# EAGLE board main_board (EAGLE 7.7.0)
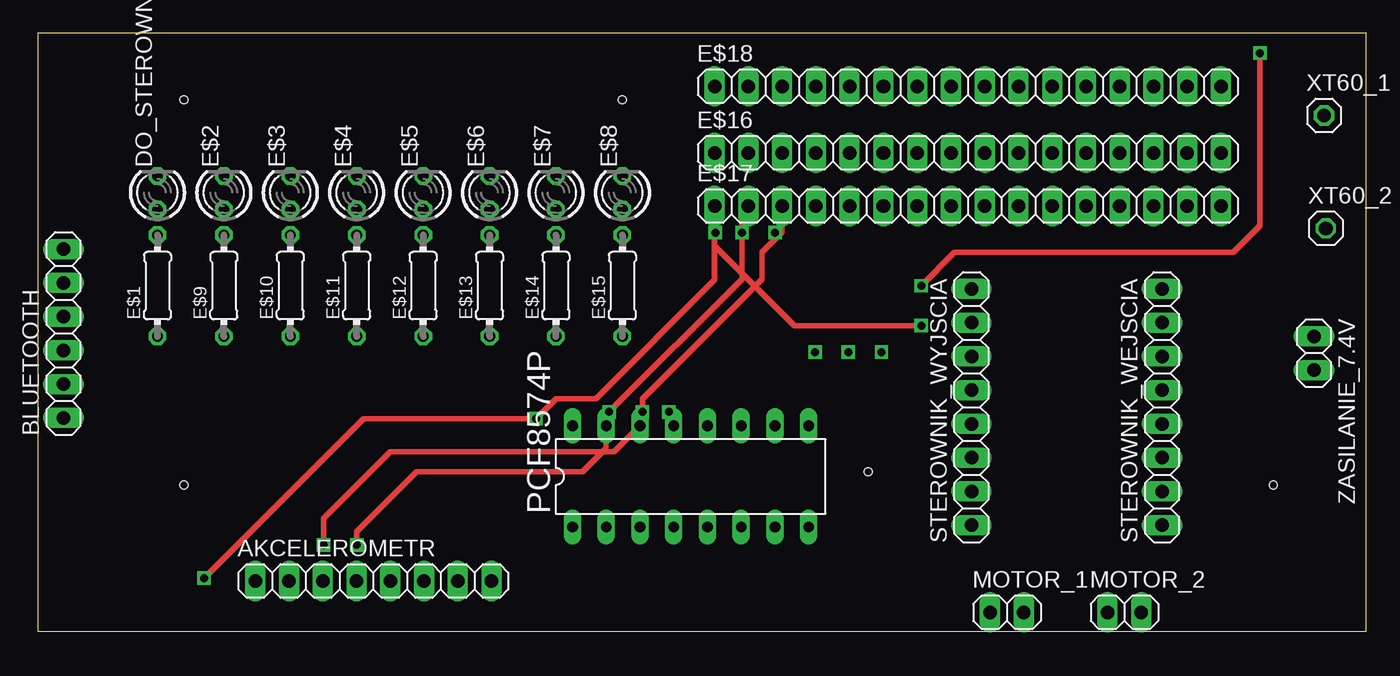
[diagram p0: board, top side]
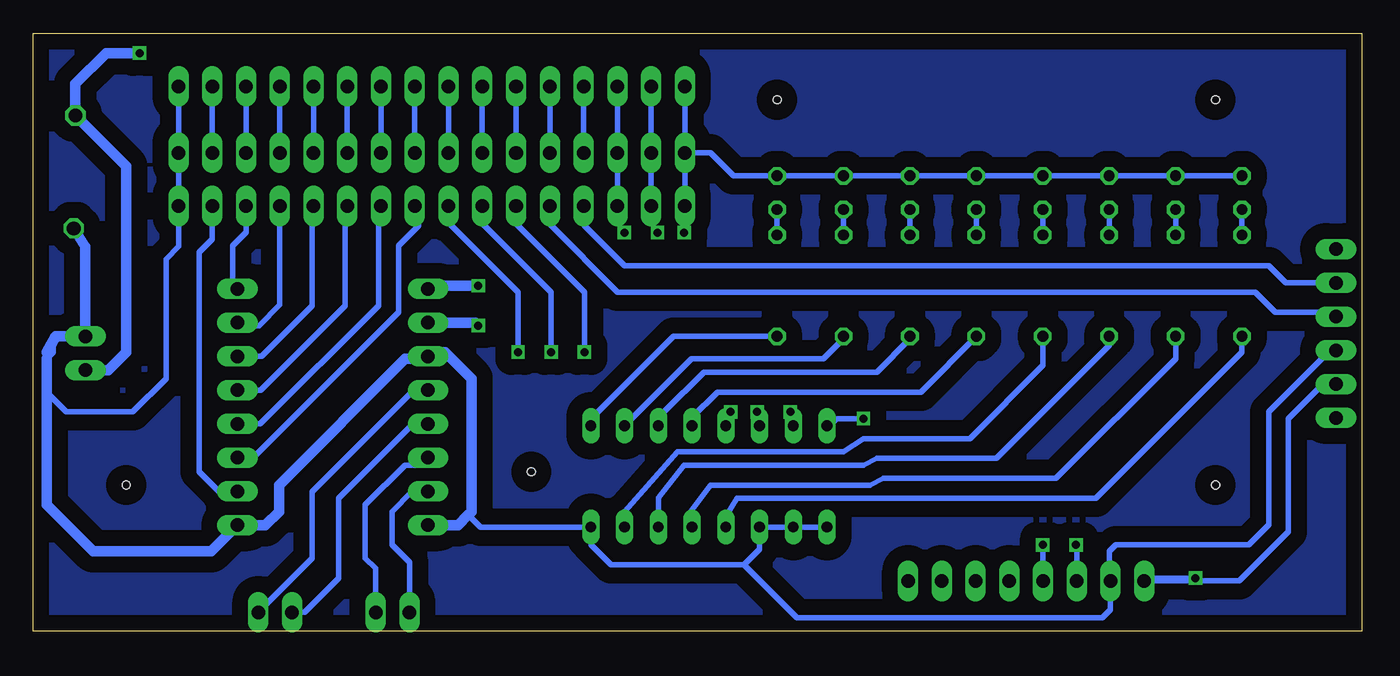
[diagram p1: board, bottom side, seen from below]

Size 100 x 45 mm. Coordinates in mm from the lower left corner, seen from the top.
Outline: 0,0 100,0 100,45 0,45 0,0
Copper layers (1*16): Top 0.035mm / dielectric 1.5mm / Bottom 0.035mm
Design rules "default": minimum track width 10mil, minimum drill 24mil, track to track 8mil, track to pad 8mil, pad to pad 8mil, via to via 8mil, smd to smd 8mil, copper to edge 40mil, drill to drill 8mil, minimum pad ring 10mil, minimum via ring 8mil, stop-mask expansion 4mil, vias tented up to drill 0mil, thermal gap 10mil
Holes 0.6 mm at 11,11 93,11 11,40 44,40 62.5,12

## Footprints (pad centres in the part's own frame; a part is rotated, then mirrored left to right if it is on the bottom)
1X08 = drill 1.016 long: 1 -8.89,0; 2 -6.35,0; 3 -3.81,0; 4 -1.27,0; 5 1.27,0; 6 3.81,0; 7 6.35,0; 8 8.89,0
1X06 = drill 1.016 long: 1 -6.35,0; 2 -3.81,0; 3 -1.27,0; 4 1.27,0; 5 3.81,0; 6 6.35,0
LED3MM = drill 0.813 octagon: A -1.27,0; K 1.27,0
0204/7 = drill 0.813 octagon: 1 -3.81,0; 2 3.81,0
1X16 = drill 1.016 long: 1 -19.05,0; 2 -16.51,0; 3 -13.97,0; 4 -11.43,0; 5 -8.89,0; 6 -6.35,0; 7 -3.81,0; 8 -1.27,0; 9 1.27,0; 10 3.81,0; 11 6.35,0; 12 8.89,0; 13 11.43,0; 14 13.97,0; 15 16.51,0; 16 19.05,0
1X02 = drill 1.016 long: 1 -1.27,0; 2 1.27,0
DIL16 = drill 0.813 long: 1 -8.89,-3.81; 2 -6.35,-3.81; 3 -3.81,-3.81; 4 -1.27,-3.81; 5 1.27,-3.81; 6 3.81,-3.81; 7 6.35,-3.81; 8 8.89,-3.81; 9 8.89,3.81; 10 6.35,3.81; 11 3.81,3.81; 12 1.27,3.81; 13 -1.27,3.81; 14 -3.81,3.81; 15 -6.35,3.81; 16 -8.89,3.81
1X01 = drill 1.016 octagon: 1 0,0

## Placement (x,y rotation side)
AKCELEROMETR  [1X08]  25.25,3.78 0 top
BLUETOOTH  [1X06]  1.93,22.41 90 top
DO_STEROWNIKA_MINUS  [LED3MM]  9,33 90 top
E$1  [0204/7]  9,26 90 top
E$2  [LED3MM]  14,33 90 top
E$3  [LED3MM]  19,33 90 top
E$4  [LED3MM]  24,33 90 top
E$5  [LED3MM]  29,33 90 top
E$6  [LED3MM]  34,33 90 top
E$7  [LED3MM]  39,33 90 top
E$8  [LED3MM]  44,33 90 top
E$9  [0204/7]  14,26 90 top
E$10  [0204/7]  19,26 90 top
E$11  [0204/7]  24,26 90 top
E$12  [0204/7]  29,26 90 top
E$13  [0204/7]  34,26 90 top
E$14  [0204/7]  39,26 90 top
E$15  [0204/7]  44,26 90 top
E$16  [1X16]  70,36 0 top
E$17  [1X16]  70,32 0 top
E$18  [1X16]  70,41 0 top
MOTOR_1  [1X02]  72.95,1.42 0 top
MOTOR_2  [1X02]  81.79,1.42 0 top
PCF8574P  PCF8574P  [DIL16]  49.13,11.65 0 top
STEROWNIK_WEJSCIA  [1X08]  84.63,16.87 90 top
STEROWNIK_WYJSCIA  [1X08]  70.28,16.87 90 top
XT60_1  8mm  [1X01]  96.82,38.81 0 top
XT60_2  8mm  [1X01]  96.95,30.32 0 top
ZASILANIE_7.4V  [1X02]  96.07,20.91 270 top

## Library data of the parts
AKCELEROMETR BLUETOOTH E$16-E$18 MOTOR_1 MOTOR_2 STEROWNIK_WEJSCIA STEROWNIK_WYJSCIA XT60_1 XT60_2 ZASILANIE_7.4V = pinhead
DO_STEROWNIKA_MINUS E$2-E$8 = led
E$1 E$9-E$15 = rcl
PCF8574P = micro-philips; MPN: PCF8574PN; OC_FARNELL: 204020; OC_NEWARK: 11N8515

## Nets
GND: AKCELEROMETR.2 BLUETOOTH.3 E$16.16 E$17.16 E$18.16 PCF8574P.1 PCF8574P.2 PCF8574P.3 PCF8574P.8 STEROWNIK_WEJSCIA.1 STEROWNIK_WYJSCIA.1 STEROWNIK_WYJSCIA.6 XT60_2.1 ZASILANIE_7.4V.1
RX: BLUETOOTH.5 E$17.4
S$2: DO_STEROWNIKA_MINUS.A E$1.2
S$3: E$2.A E$9.2
S$4: E$3.A E$10.2
S$5: E$4.A E$11.2
S$6: E$5.A E$12.2
S$7: E$6.A E$13.2
S$8: E$7.A E$14.2
S$9: E$8.A E$15.2
S$10: E$17.15 STEROWNIK_WEJSCIA.2
S$11: MOTOR_1.1 STEROWNIK_WYJSCIA.2
S$12: MOTOR_1.2 STEROWNIK_WYJSCIA.3
S$13: MOTOR_2.1 STEROWNIK_WYJSCIA.4
S$14: MOTOR_2.2 STEROWNIK_WYJSCIA.5
S$15: E$17.14 STEROWNIK_WEJSCIA.8
S$16: E$16.8 E$18.8
S$17: E$16.9 E$18.9
S$18: E$16.10 E$18.10
S$19: E$16.11 E$18.11
S$20: E$16.12 E$18.12
S$21: E$16.7 E$18.7
S$22: E$16.6 E$18.6
S$23: E$16.5 E$18.5
S$24: E$16.4 E$18.4
S$26: E$16.13 E$18.13
S$27: E$16.14 E$18.14
S$28: E$16.15 E$18.15
S$30: E$17.13 STEROWNIK_WEJSCIA.7
S$31: E$17.12 STEROWNIK_WEJSCIA.6
S$32: E$17.11 STEROWNIK_WEJSCIA.5
S$33: E$17.10 STEROWNIK_WEJSCIA.4
S$34: E$17.9 STEROWNIK_WEJSCIA.3
S$37: E$15.1 PCF8574P.9
S$38: E$14.1 PCF8574P.10
S$39: E$13.1 PCF8574P.11
S$40: E$12.1 PCF8574P.12
S$41: E$11.1 PCF8574P.7
S$42: E$10.1 PCF8574P.6
S$43: E$9.1 PCF8574P.5
S$44: E$1.1 PCF8574P.4
S$47: E$17.7
S$48: E$17.6
S$49: E$17.8
SCL: AKCELEROMETR.3 E$16.3 E$17.3 E$18.3 PCF8574P.14
SDA: AKCELEROMETR.4 E$16.2 E$17.2 E$18.2 PCF8574P.15
TX: BLUETOOTH.4 E$17.5
VCC: STEROWNIK_WYJSCIA.8 XT60_1.1 ZASILANIE_7.4V.2
VDD: AKCELEROMETR.1 BLUETOOTH.2 DO_STEROWNIKA_MINUS.K E$2.K E$8.K E$16.1 E$17.1 E$18.1 PCF8574P.16 STEROWNIK_WYJSCIA.7

## Tracks (layer width: path | path; a pad name or v marks a point on that pad's centre or on a via)
GND
  Bottom 0.406: 84.65,8 STEROWNIK_WEJSCIA.1 | 67,9 67.25,8.75 66.34,7.84 PCF8574P.8 58,7.82 58,6.5 56.5,5 46.5,5 | 70.46,20.5 STEROWNIK_WYJSCIA.6 | PCF8574P.1 PCF8574P.2 PCF8574P.3 45.32,6.18 46.5,5 | 46.5,5 42.5,1 19.5,1 18.9,1.6 AKCELEROMETR.2 19,3.88 19,6 18.5,6.5 8.5,6.5 7,8 7,16.5 2.36,21.14 BLUETOOTH.3 | E$18.16 89,40.95 89,40 89.05,39.95 E$16.16 E$17.16 | 89,31.95 E$17.16 | 98.32,22.18 98.5,22 98.5,21 99,20.5 | E$17.16 89.05,28.95 90,28 90,19 92.5,16.5 97.5,16.5 99,18
  Bottom 0.8: STEROWNIK_WYJSCIA.1 68.02,7.98 67.25,8.75 | 67,9 67,19 69,21 69.96,21 STEROWNIK_WYJSCIA.6 | 70.46,20.5 72,20.5 81.5,11 81.5,9 82.52,7.98 STEROWNIK_WEJSCIA.1 86.61,6 95.5,6 99,9.5 99,18 99,20.5 | XT60_2.1 96.07,28.94 ZASILANIE_7.4V.1 98.32,22.18 99,21
RX
  Bottom 0.406: BLUETOOTH.5 5.72,26.22 7,27.5 55.5,27.5 58.5,30.5 58.5,31.93 E$17.4
S$1  (via drill 0.6)
  other vias: 43,16.5
S$2
  Bottom 0.406: DO_STEROWNIKA_MINUS.A E$1.2
S$3
  Bottom 0.406: E$2.A E$9.2
S$4
  Bottom 0.406: E$3.A E$10.2
S$5
  Bottom 0.406: E$4.A E$11.2
S$6
  Bottom 0.406: E$5.A E$12.2
S$7
  Bottom 0.406: E$6.A E$13.2
S$8
  Bottom 0.406: E$7.A E$14.2
S$9
  Bottom 0.406: E$8.A E$15.2
S$10
  Bottom 0.406: E$17.15 86.51,29.49 87.5,28.5 87.5,12 86,10.5 84.65,10.5 STEROWNIK_WEJSCIA.2
S$11
  Bottom 0.406: MOTOR_1.1 71.68,5.18 73,6.5 73,9 71.5,10.5 70.3,10.5 STEROWNIK_WYJSCIA.2
S$12
  Bottom 0.406: MOTOR_1.2 74.22,4.72 75,5.5 75,9.5 72,12.5 70.84,12.5 STEROWNIK_WYJSCIA.3
S$13
  Bottom 0.406: MOTOR_2.1 79.58,1.42 77,4 77,10 71.5,15.5 70.38,15.5 STEROWNIK_WYJSCIA.4
S$14
  Bottom 0.406: MOTOR_2.2 83.06,1.44 79,5.5 79,10.5 71.5,18 70.42,18 STEROWNIK_WYJSCIA.5
S$15
  Bottom 0.406: E$17.14 83.97,30.03 85,29 85,26.13 STEROWNIK_WEJSCIA.8
S$16
  Bottom 0.406: E$18.8 E$16.8
S$17
  Bottom 0.406: E$18.9 E$16.9
S$18
  Bottom 0.406: E$18.10 E$16.10
S$19
  Bottom 0.406: E$18.11 E$16.11
S$20
  Bottom 0.406: E$18.12 E$16.12
S$21
  Bottom 0.406: E$18.7 E$16.7
S$22
  Bottom 0.406: E$18.6 E$16.6
S$23
  Bottom 0.406: E$18.5 E$16.5
S$24
  Bottom 0.406: E$18.4 E$16.4
S$25  (via drill 0.6)
  other vias: 45.5,16.5
S$26
  Bottom 0.406: E$18.13 E$16.13
S$27
  Bottom 0.406: E$18.14 83.97,36.03 84,36 E$16.14
S$28
  Bottom 0.406: E$18.15 E$16.15
S$29  (via drill 0.6)
  other vias: 51,30
S$30
  Bottom 0.406: E$17.13 81.43,24.57 83,23 84.41,23 STEROWNIK_WEJSCIA.7
S$31
  Bottom 0.406: STEROWNIK_WEJSCIA.6 82.82,20.68 79,24.5 79,31.89 E$17.12
S$32
  Bottom 0.406: STEROWNIK_WEJSCIA.5 82.86,18.14 76.5,24.5 76.5,31 76,31.5 76,31.65 E$17.11
S$33
  Bottom 0.406: STEROWNIK_WEJSCIA.4 82.9,15.6 74,24.5 74,31.81 E$17.10
S$34
  Bottom 0.406: STEROWNIK_WEJSCIA.3 83.44,13.06 72.5,24 72.5,29 71,30.5 71,31.73 E$17.9
S$35  (via drill 0.6)
  other vias: 55.5,30
S$36  (via drill 0.6)
  other vias: 58.5,21
S$37
  Bottom 0.406: E$15.1 51.81,22.19 58,16 58,15.48 PCF8574P.9
S$38
  Bottom 0.406: E$14.1 39,22 40.5,20.5 50.44,20.5 PCF8574P.10
S$39
  Bottom 0.406: E$13.1 34,22 36.5,19.5 49.5,19.5 52.5,16.5 52.5,15.9 PCF8574P.11
S$40
  Bottom 0.406: PCF8574P.12 50.4,16.1 48.5,18 33.19,18 E$12.1
S$41
  Bottom 0.406: E$11.1 24,20 29.5,14.5 37.5,14.5 39,13.5 51.5,13.5 55.5,9 55.5,7.86 PCF8574P.7
S$42
  Bottom 0.406: PCF8574P.6 52.94,10.06 51,12.5 37.5,12.5 36.5,13 27.5,13 19,21.5 E$10.1
S$43
  Bottom 0.406: E$9.1 14,20.5 23,11.5 36,11.5 37,11 49,11 50.5,9 50.5,7.94 PCF8574P.5
S$44
  Bottom 0.406: PCF8574P.4 47.86,8.64 47,10 20,10 9,21 E$1.1
S$45  (via drill 0.6)
  other vias: 61,21
S$46  (via drill 0.6)
  other vias: 63.5,21
S$47
  Bottom 0.406: E$17.7 66.19,30.69 61,25.5 61,21
S$48
  Bottom 0.406: E$17.6 63.65,30.65 58.5,25.5 58.5,21
S$49
  Bottom 0.406: E$17.8 68.73,30.73 63.5,25.5 63.5,21
S$50  (via drill 0.6)
  other vias: 47.5,16.5
S$51
  pour Bottom (isolate 1.2): 0,0 0,45 100,45 100,0
SCL  (via drill 0.6)
  Top 0.406: E$17.3 56.03,30.03 54.5,28.5 54.5,26.5 45.5,17.5 45.5,15.64 PCF8574P.14 43.36,13.5 26.5,13.5 21.5,8.5 v21.5,6.5
  Bottom 0.406: E$18.3 E$16.3 E$17.3 | AKCELEROMETR.3 21.44,6.44 v21.5,6.5
SDA  (via drill 0.6)
  Top 0.406: v43,16.5 53,26.5 v53,30 53,31.51 E$17.2 | PCF8574P.15 42.78,13.78 41,12 28.5,12 24,7.5 v24,6.5
  Bottom 0.406: E$18.2 E$16.2 E$17.2 | PCF8574P.15 42.78,16.28 v43,16.5 | v24,6.5 24,3.8 AKCELEROMETR.4
TX
  Bottom 0.406: E$17.5 61.11,30.61 56,25.5 8,25.5 6.5,24 3,24 2.5,23.5 2.11,23.5 BLUETOOTH.4
VCC  (via drill 0.6)
  Top 0.406: v92,43.5 92,30.5 90,28.5 69,28.5 v66.5,26
  Bottom 0.406: 70.04,26 STEROWNIK_WYJSCIA.8
  Bottom 0.8: ZASILANIE_7.4V.2 94.36,19.64 93,21 93,34.99 XT60_1.1 96.82,41.18 94.5,43.5 v92,43.5 | v66.5,26 70.04,26
VDD  (via drill 0.6)
  Top 0.406: E$17.1 50.95,29 | 50.95,29 50.95,26.45 42,17.5 39,17.5 v37.5,16 24.5,16 v12.5,4 | v66.5,23 56.95,23 50.95,29
  Bottom 0.406: E$18.1 E$16.1 | E$16.1 E$17.1 51,31.95 | DO_STEROWNIKA_MINUS.K E$2.K E$8.K 47.27,34.27 49,36 E$16.1 | 39.5,16 39.7,16 PCF8574P.16 40.04,15.46 39.5,16 | 39.5,16 v37.5,16 | v12.5,4 16.14,4 AKCELEROMETR.1 9.22,3.78 5.5,7.5 5.5,16 3,18.5 2.03,18.5 BLUETOOTH.2
  Bottom 0.8: STEROWNIK_WYJSCIA.7 66.72,23.22 v66.5,23